# EAGLE board lazer (EAGLE 8.7.1)
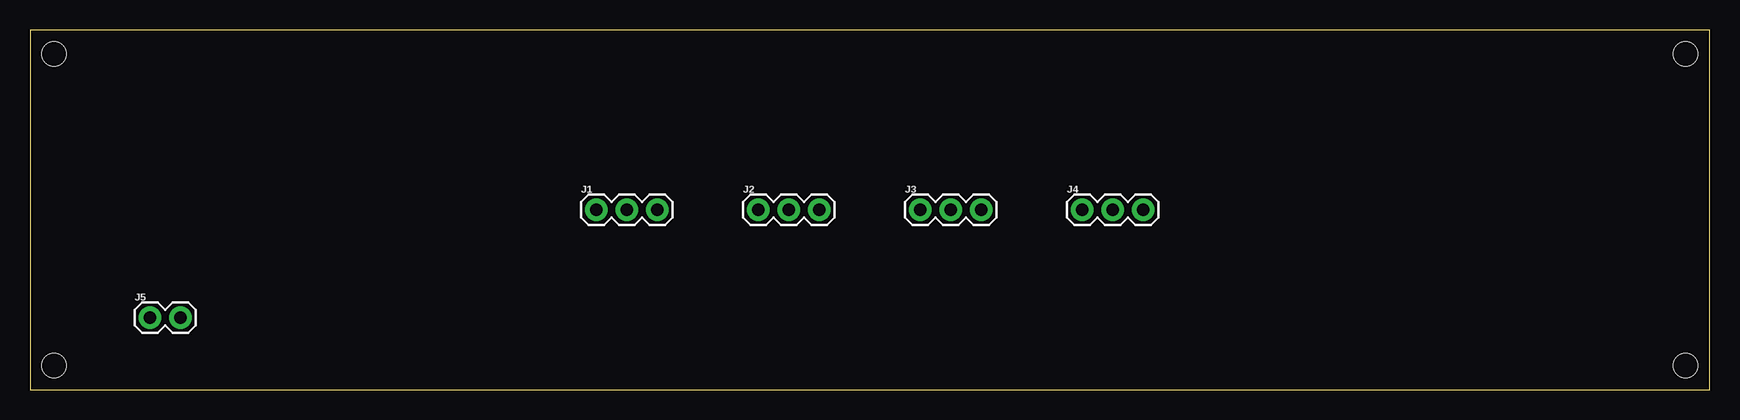
[diagram p0: board, top side]
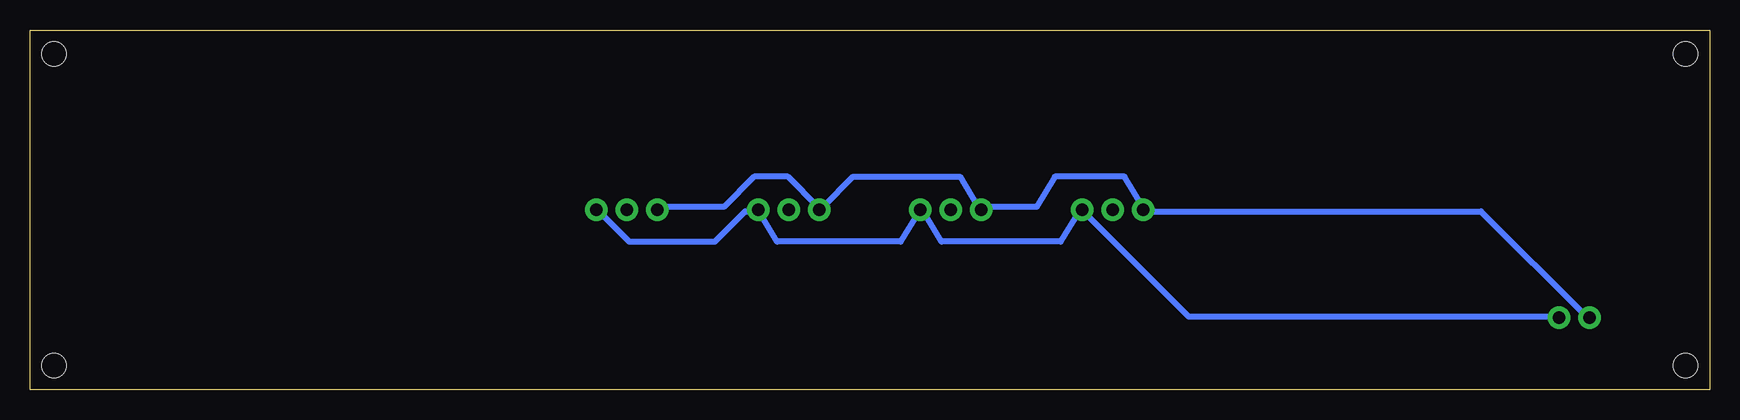
[diagram p1: board, bottom side, seen from below]

Size 140 x 30 mm. Coordinates in mm from the lower left corner, seen from the top.
Outline: 0,0 140,0 140,30 0,30 0,0
Copper layers (1*16): Top 0.035mm / dielectric 1.5mm / Bottom 0.035mm
Design rules "default": minimum track width 6mil, minimum drill 0.35mm, track to track 6mil, track to pad 6mil, pad to pad 6mil, via to via 6mil, smd to smd 6mil, copper to edge 40mil, drill to drill 6mil, minimum pad ring 10mil, minimum via ring 8mil, stop-mask expansion 4mil, vias tented up to drill 0mil, thermal gap 10mil
Net classes: 0 default: width 0.508 mm, drill 0.508 mm, clearance 0.254 mm
Holes 2 mm at 2,2 138,2 138,28 2,28

## Footprints (pad centres in the part's own frame; a part is rotated, then mirrored left to right if it is on the bottom)
1X03 = drill 1.016 pad 1.88: 1 -2.54,0; 2 0,0; 3 2.54,0
1X02 = drill 1.016 pad 1.88: 1 0,0; 2 2.54,0

## Placement (x,y rotation side)
J1  [1X03]  49.75,15 0 top
J2  [1X03]  63.25,15 0 top
J3  [1X03]  76.75,15 0 top
J4  [1X03]  90.25,15 0 top
J5  [1X02]  10,6 0 top

## Library data of the parts
J1-J4 = wendor; PROD_ID: XXX-00000
J5 = SparkFun-Connectors

## Nets
GND: J1.3 J2.3 J3.3 J4.3 J5.2
POWER: J1.1 J2.1 J3.1 J4.1 J5.1

## Tracks (layer width: path | path; a pad name or v marks a point on that pad's centre or on a via)
GND
  Bottom 0.508: J4.3 92.58,14.86 90.06,12.34 82.92,12.34 80.39,14.86 79.63,14.86 J3.3 79.25,14.86 77.72,12.34 67.44,12.34 65.91,14.86 J2.3 65.53,14.86 64.01,12.34 54.1,12.34 52.58,14.86 J1.3 52.2,14.86 43.43,6.1 12.57,6.1 J5.2
POWER
  Bottom 0.508: J4.1 87.63,15.24 82.15,15.24 79.63,17.76 76.82,17.76 74.3,15.24 J3.1 73.91,15.24 71.39,17.76 62.48,17.76 60.96,15.24 J2.1 60.58,15.24 56.1,15.24 54.58,17.76 48.77,17.76 47.24,15.24 J1.1 46.86,14.86 19.05,14.86 10.29,6.1 J5.1